# Altium PCB Main.PcbDoc (part 1 of 4)
Units mm, origin at the board's own origin, x right, y up, seen from the top; angles counter-clockwise.
Board outline 282.3 x 31.89 mm, 2 copper layers (Top Layer, Bottom Layer); 208 components, 197 nets, 886 pads, 366 vias.
Unrouted connection lines stored in the file: 118.
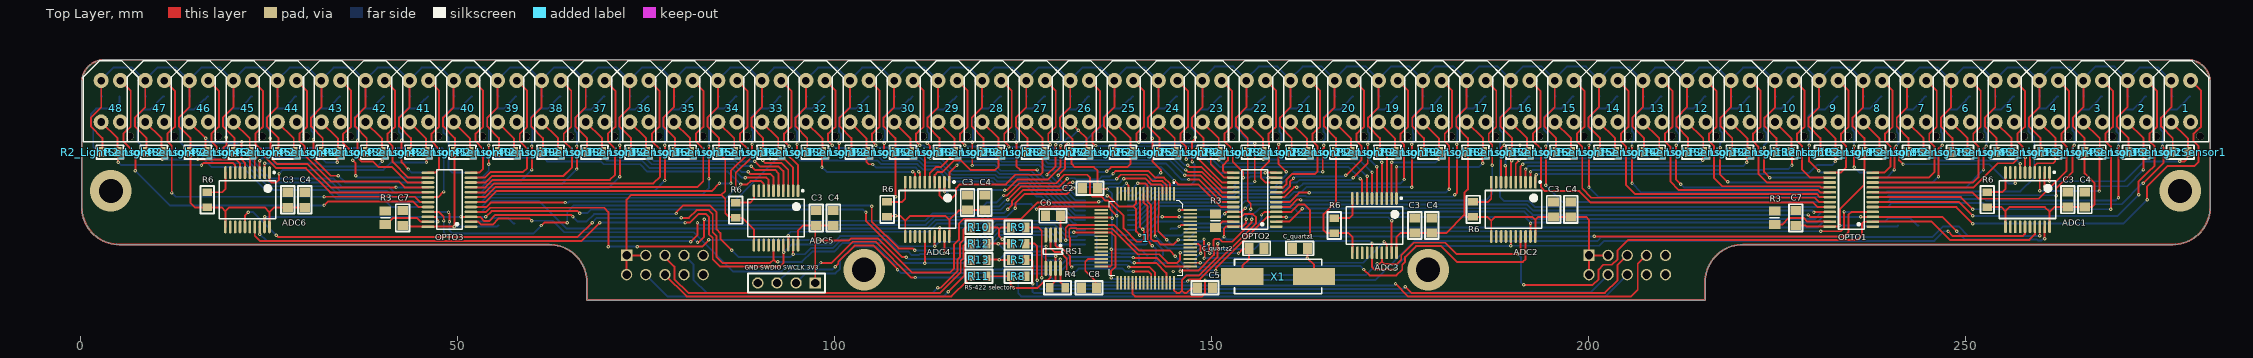
[diagram p0: Top Layer view]
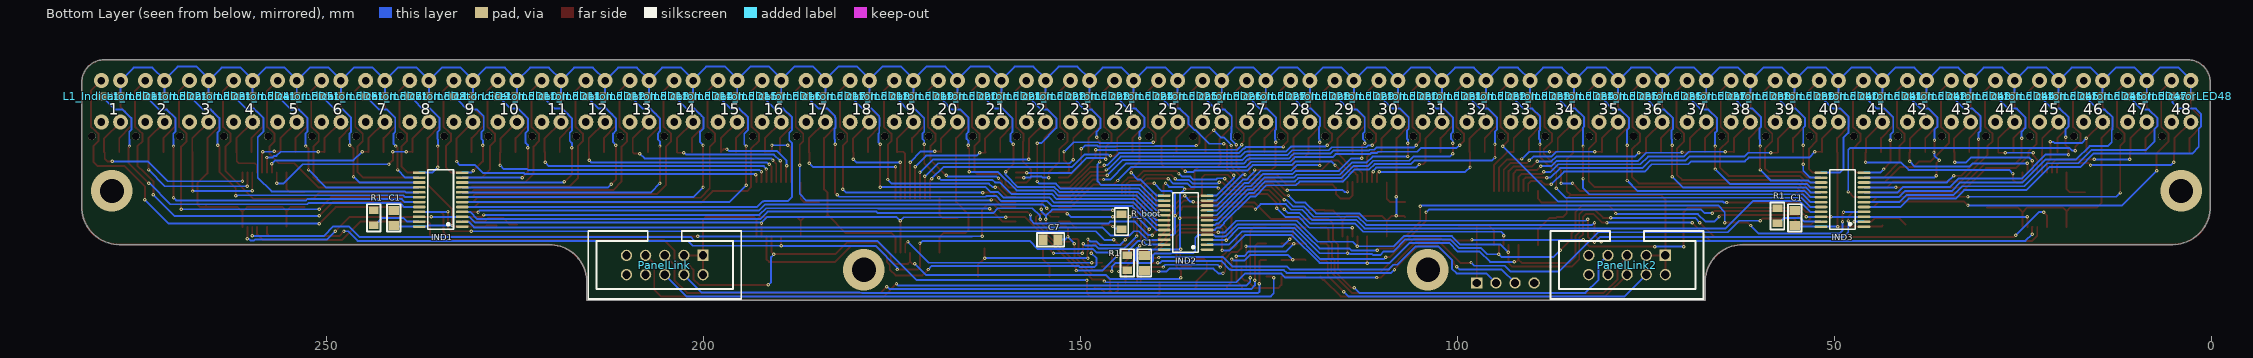
[diagram p1: Bottom Layer view, seen from below]
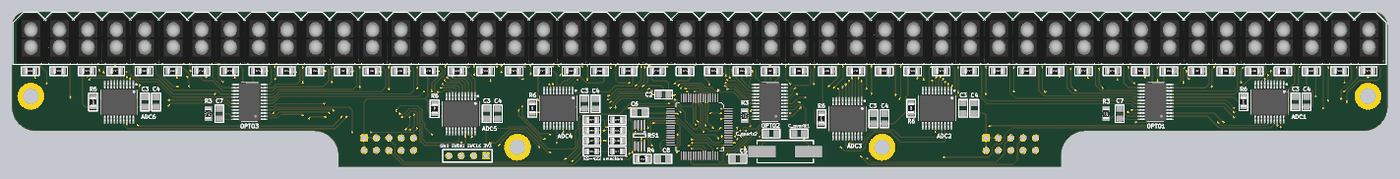
[diagram p5: 3D render of the assembled board from above, using the file's embedded part models]
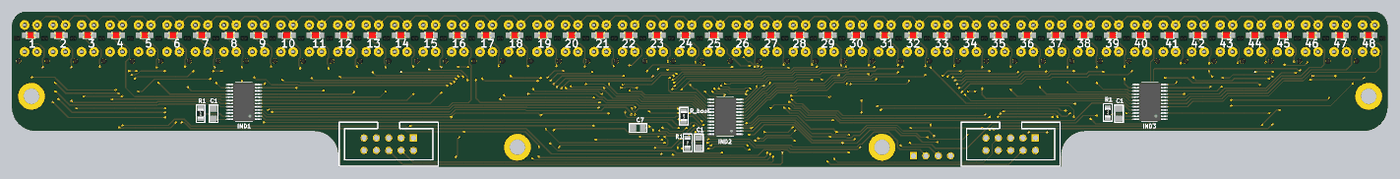
[diagram p6: 3D render of the assembled board from below, using the file's embedded part models]

## Layer stack, top to bottom
Top Solder: solder mask 0.0102, Solder Resist, Dk 3.5
Top Layer: signal copper 0.0356
Dielectric 1: dielectric 0.32, FR-4, Dk 4.8
Bottom Layer: signal copper 0.0356
Bottom Solder: solder mask 0.0102, Solder Resist, Dk 3.5

## Board outline
5.127,17.66 62.127,17.66 cw(c62.127,12.66) 67.127,12.66 67.127,10.287 215.427,10.287 215.427,12.66 cw(c220.427,12.66) 220.427,17.66 277.427,17.66 ccw(c277.427,22.66) 282.427,22.66 282.427,39.176 ccw(c279.427,39.176) 279.427,42.176 3.127,42.176 ccw(c3.127,39.176) 0.127,39.176 0.127,22.66 ccw(c5.127,22.66)

## Design rules (kind name [scope] priority, off if disabled: settings)
Clearance [All] p1: gap=0.2 ignorepadtopadclearanceinfootprint=TRUE
ComponentClearance [All] p1: gap=0 collisioncheckmode=3 verticalgap=0 showdistances=FALSE
MinimumSolderMaskSliver [All] p1: minsoldermaskwidth=0.01
PolygonConnect [All] p1: connectstyle=Relief reliefconductorwidth=0.254 reliefentries=4 polygonreliefangle="90 Angle" airgapwidth=0.254
RoomDefinition LightSensor48 [InComponentClass('LightSensor48')] p1 off: confinementstyle=ConfineIn formatcopy=TRUE lockcomponents=FALSE outline 1.083,42.258 1.083,27.145 6.925,27.145 6.925,42.258
RoomDefinition LightSensor47 [InComponentClass('LightSensor47')] p2 off: confinementstyle=ConfineIn formatcopy=TRUE lockcomponents=FALSE outline 6.925,42.258 6.925,27.145 12.767,27.145 12.767,42.258
RoomDefinition LightSensor46 [InComponentClass('LightSensor46')] p3 off: confinementstyle=ConfineIn formatcopy=TRUE lockcomponents=FALSE outline 12.767,42.258 12.767,27.145 18.609,27.145 18.609,42.258
RoomDefinition LightSensor45 [InComponentClass('LightSensor45')] p4 off: confinementstyle=ConfineIn formatcopy=TRUE lockcomponents=FALSE outline 18.609,42.258 18.609,27.145 24.451,27.145 24.451,42.258
RoomDefinition LightSensor44 [InComponentClass('LightSensor44')] p5 off: confinementstyle=ConfineIn formatcopy=TRUE lockcomponents=FALSE outline 24.451,42.258 24.451,27.145 30.293,27.145 30.293,42.258
RoomDefinition LightSensor43 [InComponentClass('LightSensor43')] p6 off: confinementstyle=ConfineIn formatcopy=TRUE lockcomponents=FALSE outline 30.293,42.258 30.293,27.145 36.135,27.145 36.135,42.258
RoomDefinition LightSensor42 [InComponentClass('LightSensor42')] p7 off: confinementstyle=ConfineIn formatcopy=TRUE lockcomponents=FALSE outline 36.135,42.258 36.135,27.145 41.977,27.145 41.977,42.258
RoomDefinition LightSensor41 [InComponentClass('LightSensor41')] p8 off: confinementstyle=ConfineIn formatcopy=TRUE lockcomponents=FALSE outline 41.977,42.258 41.977,27.145 47.819,27.145 47.819,42.258
RoomDefinition LightSensor40 [InComponentClass('LightSensor40')] p9 off: confinementstyle=ConfineIn formatcopy=TRUE lockcomponents=FALSE outline 47.819,42.258 47.819,27.145 53.661,27.145 53.661,42.258
RoomDefinition LightSensor39 [InComponentClass('LightSensor39')] p10 off: confinementstyle=ConfineIn formatcopy=TRUE lockcomponents=FALSE outline 53.661,42.258 53.661,27.145 59.503,27.145 59.503,42.258
RoomDefinition LightSensor38 [InComponentClass('LightSensor38')] p11 off: confinementstyle=ConfineIn formatcopy=TRUE lockcomponents=FALSE outline 59.503,42.258 59.503,27.145 65.345,27.145 65.345,42.258
RoomDefinition LightSensor37 [InComponentClass('LightSensor37')] p12 off: confinementstyle=ConfineIn formatcopy=TRUE lockcomponents=FALSE outline 65.345,42.258 65.345,27.145 71.187,27.145 71.187,42.258
RoomDefinition LightSensor36 [InComponentClass('LightSensor36')] p13 off: confinementstyle=ConfineIn formatcopy=TRUE lockcomponents=FALSE outline 71.187,42.258 71.187,27.145 77.029,27.145 77.029,42.258
RoomDefinition LightSensor35 [InComponentClass('LightSensor35')] p14 off: confinementstyle=ConfineIn formatcopy=TRUE lockcomponents=FALSE outline 77.029,42.258 77.029,27.145 82.871,27.145 82.871,42.258
RoomDefinition LightSensor34 [InComponentClass('LightSensor34')] p15 off: confinementstyle=ConfineIn formatcopy=TRUE lockcomponents=FALSE outline 82.871,42.258 82.871,27.145 88.713,27.145 88.713,42.258
RoomDefinition LightSensor33 [InComponentClass('LightSensor33')] p16 off: confinementstyle=ConfineIn formatcopy=TRUE lockcomponents=FALSE outline 88.713,42.258 88.713,27.145 94.555,27.145 94.555,42.258
RoomDefinition LightSensor32 [InComponentClass('LightSensor32')] p17 off: confinementstyle=ConfineIn formatcopy=TRUE lockcomponents=FALSE outline 94.555,42.258 94.555,27.145 100.397,27.145 100.397,42.258
RoomDefinition LightSensor31 [InComponentClass('LightSensor31')] p18 off: confinementstyle=ConfineIn formatcopy=TRUE lockcomponents=FALSE outline 100.397,42.258 100.397,27.145 106.239,27.145 106.239,42.258
RoomDefinition LightSensor30 [InComponentClass('LightSensor30')] p19 off: confinementstyle=ConfineIn formatcopy=TRUE lockcomponents=FALSE outline 106.239,42.258 106.239,27.145 112.081,27.145 112.081,42.258
RoomDefinition LightSensor29 [InComponentClass('LightSensor29')] p20 off: confinementstyle=ConfineIn formatcopy=TRUE lockcomponents=FALSE outline 112.081,42.258 112.081,27.145 117.923,27.145 117.923,42.258
RoomDefinition LightSensor28 [InComponentClass('LightSensor28')] p21 off: confinementstyle=ConfineIn formatcopy=TRUE lockcomponents=FALSE outline 117.923,42.258 117.923,27.145 123.765,27.145 123.765,42.258
RoomDefinition LightSensor27 [InComponentClass('LightSensor27')] p22 off: confinementstyle=ConfineIn formatcopy=TRUE lockcomponents=FALSE outline 123.765,42.258 123.765,27.145 129.607,27.145 129.607,42.258
RoomDefinition LightSensor26 [InComponentClass('LightSensor26')] p23 off: confinementstyle=ConfineIn formatcopy=TRUE lockcomponents=FALSE outline 129.607,42.258 129.607,27.145 135.449,27.145 135.449,42.258
RoomDefinition LightSensor25 [InComponentClass('LightSensor25')] p24 off: confinementstyle=ConfineIn formatcopy=TRUE lockcomponents=FALSE outline 135.449,42.258 135.449,27.145 141.291,27.145 141.291,42.258
RoomDefinition LightSensor24 [InComponentClass('LightSensor24')] p25 off: confinementstyle=ConfineIn formatcopy=TRUE lockcomponents=FALSE outline 141.291,42.258 141.291,27.145 147.133,27.145 147.133,42.258
RoomDefinition LightSensor23 [InComponentClass('LightSensor23')] p26 off: confinementstyle=ConfineIn formatcopy=TRUE lockcomponents=FALSE outline 147.133,42.258 147.133,27.145 152.975,27.145 152.975,42.258
RoomDefinition LightSensor22 [InComponentClass('LightSensor22')] p27 off: confinementstyle=ConfineIn formatcopy=TRUE lockcomponents=FALSE outline 152.975,42.258 152.975,27.145 158.817,27.145 158.817,42.258
RoomDefinition LightSensor21 [InComponentClass('LightSensor21')] p28 off: confinementstyle=ConfineIn formatcopy=TRUE lockcomponents=FALSE outline 158.817,42.258 158.817,27.145 164.659,27.145 164.659,42.258
RoomDefinition LightSensor20 [InComponentClass('LightSensor20')] p29 off: confinementstyle=ConfineIn formatcopy=TRUE lockcomponents=FALSE outline 164.659,42.258 164.659,27.145 170.501,27.145 170.501,42.258
RoomDefinition LightSensor19 [InComponentClass('LightSensor19')] p30 off: confinementstyle=ConfineIn formatcopy=TRUE lockcomponents=FALSE outline 170.501,42.258 170.501,27.145 176.343,27.145 176.343,42.258
RoomDefinition LightSensor18 [InComponentClass('LightSensor18')] p31 off: confinementstyle=ConfineIn formatcopy=TRUE lockcomponents=FALSE outline 176.343,42.258 176.343,27.145 182.185,27.145 182.185,42.258
RoomDefinition LightSensor17 [InComponentClass('LightSensor17')] p32 off: confinementstyle=ConfineIn formatcopy=TRUE lockcomponents=FALSE outline 182.185,42.258 182.185,27.145 188.027,27.145 188.027,42.258
RoomDefinition LightSensor16 [InComponentClass('LightSensor16')] p33 off: confinementstyle=ConfineIn formatcopy=TRUE lockcomponents=FALSE outline 188.027,42.258 188.027,27.145 193.869,27.145 193.869,42.258
RoomDefinition LightSensor15 [InComponentClass('LightSensor15')] p34 off: confinementstyle=ConfineIn formatcopy=TRUE lockcomponents=FALSE outline 193.869,42.258 193.869,27.145 199.711,27.145 199.711,42.258
RoomDefinition LightSensor14 [InComponentClass('LightSensor14')] p35 off: confinementstyle=ConfineIn formatcopy=TRUE lockcomponents=FALSE outline 199.711,42.258 199.711,27.145 205.553,27.145 205.553,42.258
RoomDefinition LightSensor13 [InComponentClass('LightSensor13')] p36 off: confinementstyle=ConfineIn formatcopy=TRUE lockcomponents=FALSE outline 205.553,42.258 205.553,27.145 211.395,27.145 211.395,42.258
RoomDefinition LightSensor12 [InComponentClass('LightSensor12')] p37 off: confinementstyle=ConfineIn formatcopy=TRUE lockcomponents=FALSE outline 211.395,42.258 211.395,27.145 217.237,27.145 217.237,42.258
RoomDefinition LightSensor11 [InComponentClass('LightSensor11')] p38 off: confinementstyle=ConfineIn formatcopy=TRUE lockcomponents=FALSE outline 217.237,42.258 217.237,27.145 223.079,27.145 223.079,42.258
RoomDefinition LightSensor10 [InComponentClass('LightSensor10')] p39 off: confinementstyle=ConfineIn formatcopy=TRUE lockcomponents=FALSE outline 223.079,42.258 223.079,27.145 228.921,27.145 228.921,42.258
RoomDefinition LightSensor9 [InComponentClass('LightSensor9')] p40 off: confinementstyle=ConfineIn formatcopy=TRUE lockcomponents=FALSE outline 228.921,42.258 228.921,27.145 234.763,27.145 234.763,42.258
RoomDefinition LightSensor8 [InComponentClass('LightSensor8')] p41 off: confinementstyle=ConfineIn formatcopy=TRUE lockcomponents=FALSE outline 234.763,42.258 234.763,27.145 240.605,27.145 240.605,42.258
RoomDefinition LightSensor7 [InComponentClass('LightSensor7')] p42 off: confinementstyle=ConfineIn formatcopy=TRUE lockcomponents=FALSE outline 240.605,42.258 240.605,27.145 246.447,27.145 246.447,42.258
RoomDefinition LightSensor6 [InComponentClass('LightSensor6')] p43 off: confinementstyle=ConfineIn formatcopy=TRUE lockcomponents=FALSE outline 246.447,42.258 246.447,27.145 252.289,27.145 252.289,42.258
RoomDefinition LightSensor5 [InComponentClass('LightSensor5')] p44 off: confinementstyle=ConfineIn formatcopy=TRUE lockcomponents=FALSE outline 252.289,42.258 252.289,27.145 258.131,27.145 258.131,42.258
RoomDefinition LightSensor4 [InComponentClass('LightSensor4')] p45 off: confinementstyle=ConfineIn formatcopy=TRUE lockcomponents=FALSE outline 258.131,42.258 258.131,27.145 263.973,27.145 263.973,42.258
RoomDefinition LightSensor3 [InComponentClass('LightSensor3')] p46 off: confinementstyle=ConfineIn formatcopy=TRUE lockcomponents=FALSE outline 263.973,42.258 263.973,27.145 269.815,27.145 269.815,42.258
RoomDefinition LightSensor2 [InComponentClass('LightSensor2')] p47 off: confinementstyle=ConfineIn formatcopy=TRUE lockcomponents=FALSE outline 269.815,42.258 269.815,27.145 275.657,27.145 275.657,42.258
RoomDefinition LightSensor1 [InComponentClass('LightSensor1')] p48 off: confinementstyle=ConfineIn formatcopy=TRUE lockcomponents=FALSE outline 275.657,42.258 275.657,27.145 281.499,27.145 281.499,42.258
RoomDefinition IndicatorLED48 [InComponentClass('IndicatorLED48')] p49 off: confinementstyle=ConfineIn formatcopy=TRUE lockcomponents=FALSE outline 1.083,38.321 1.083,36.162 6.925,36.162 6.925,38.321
RoomDefinition IndicatorLED47 [InComponentClass('IndicatorLED47')] p50 off: confinementstyle=ConfineIn formatcopy=TRUE lockcomponents=FALSE outline 6.925,38.321 6.925,36.162 12.767,36.162 12.767,38.321
RoomDefinition IndicatorLED46 [InComponentClass('IndicatorLED46')] p51 off: confinementstyle=ConfineIn formatcopy=TRUE lockcomponents=FALSE outline 12.767,38.321 12.767,36.162 18.609,36.162 18.609,38.321
RoomDefinition IndicatorLED45 [InComponentClass('IndicatorLED45')] p52 off: confinementstyle=ConfineIn formatcopy=TRUE lockcomponents=FALSE outline 18.609,38.321 18.609,36.162 24.451,36.162 24.451,38.321
RoomDefinition IndicatorLED44 [InComponentClass('IndicatorLED44')] p53 off: confinementstyle=ConfineIn formatcopy=TRUE lockcomponents=FALSE outline 24.451,38.321 24.451,36.162 30.293,36.162 30.293,38.321
RoomDefinition IndicatorLED43 [InComponentClass('IndicatorLED43')] p54 off: confinementstyle=ConfineIn formatcopy=TRUE lockcomponents=FALSE outline 30.293,38.321 30.293,36.162 36.135,36.162 36.135,38.321
RoomDefinition IndicatorLED42 [InComponentClass('IndicatorLED42')] p55 off: confinementstyle=ConfineIn formatcopy=TRUE lockcomponents=FALSE outline 36.135,38.321 36.135,36.162 41.977,36.162 41.977,38.321
RoomDefinition IndicatorLED41 [InComponentClass('IndicatorLED41')] p56 off: confinementstyle=ConfineIn formatcopy=TRUE lockcomponents=FALSE outline 41.977,38.321 41.977,36.162 47.819,36.162 47.819,38.321
RoomDefinition IndicatorLED40 [InComponentClass('IndicatorLED40')] p57 off: confinementstyle=ConfineIn formatcopy=TRUE lockcomponents=FALSE outline 47.819,38.321 47.819,36.162 53.661,36.162 53.661,38.321
RoomDefinition IndicatorLED39 [InComponentClass('IndicatorLED39')] p58 off: confinementstyle=ConfineIn formatcopy=TRUE lockcomponents=FALSE outline 53.661,38.321 53.661,36.162 59.503,36.162 59.503,38.321
RoomDefinition IndicatorLED38 [InComponentClass('IndicatorLED38')] p59 off: confinementstyle=ConfineIn formatcopy=TRUE lockcomponents=FALSE outline 59.503,38.321 59.503,36.162 65.345,36.162 65.345,38.321
RoomDefinition IndicatorLED37 [InComponentClass('IndicatorLED37')] p60 off: confinementstyle=ConfineIn formatcopy=TRUE lockcomponents=FALSE outline 65.345,38.321 65.345,36.162 71.187,36.162 71.187,38.321
RoomDefinition IndicatorLED36 [InComponentClass('IndicatorLED36')] p61 off: confinementstyle=ConfineIn formatcopy=TRUE lockcomponents=FALSE outline 71.187,38.321 71.187,36.162 77.029,36.162 77.029,38.321
RoomDefinition IndicatorLED35 [InComponentClass('IndicatorLED35')] p62 off: confinementstyle=ConfineIn formatcopy=TRUE lockcomponents=FALSE outline 77.029,38.321 77.029,36.162 82.871,36.162 82.871,38.321
RoomDefinition IndicatorLED34 [InComponentClass('IndicatorLED34')] p63 off: confinementstyle=ConfineIn formatcopy=TRUE lockcomponents=FALSE outline 82.871,38.321 82.871,36.162 88.713,36.162 88.713,38.321
RoomDefinition IndicatorLED33 [InComponentClass('IndicatorLED33')] p64 off: confinementstyle=ConfineIn formatcopy=TRUE lockcomponents=FALSE outline 88.713,38.321 88.713,36.162 94.555,36.162 94.555,38.321
RoomDefinition IndicatorLED32 [InComponentClass('IndicatorLED32')] p65 off: confinementstyle=ConfineIn formatcopy=TRUE lockcomponents=FALSE outline 94.555,38.321 94.555,36.162 100.397,36.162 100.397,38.321
RoomDefinition IndicatorLED31 [InComponentClass('IndicatorLED31')] p66 off: confinementstyle=ConfineIn formatcopy=TRUE lockcomponents=FALSE outline 100.397,38.321 100.397,36.162 106.239,36.162 106.239,38.321
RoomDefinition IndicatorLED30 [InComponentClass('IndicatorLED30')] p67 off: confinementstyle=ConfineIn formatcopy=TRUE lockcomponents=FALSE outline 106.239,38.321 106.239,36.162 112.081,36.162 112.081,38.321
RoomDefinition IndicatorLED29 [InComponentClass('IndicatorLED29')] p68 off: confinementstyle=ConfineIn formatcopy=TRUE lockcomponents=FALSE outline 112.081,38.321 112.081,36.162 117.923,36.162 117.923,38.321
RoomDefinition IndicatorLED28 [InComponentClass('IndicatorLED28')] p69 off: confinementstyle=ConfineIn formatcopy=TRUE lockcomponents=FALSE outline 117.923,38.321 117.923,36.162 123.765,36.162 123.765,38.321
RoomDefinition IndicatorLED27 [InComponentClass('IndicatorLED27')] p70 off: confinementstyle=ConfineIn formatcopy=TRUE lockcomponents=FALSE outline 123.765,38.321 123.765,36.162 129.607,36.162 129.607,38.321
RoomDefinition IndicatorLED26 [InComponentClass('IndicatorLED26')] p71 off: confinementstyle=ConfineIn formatcopy=TRUE lockcomponents=FALSE outline 129.607,38.321 129.607,36.162 135.449,36.162 135.449,38.321
RoomDefinition IndicatorLED25 [InComponentClass('IndicatorLED25')] p72 off: confinementstyle=ConfineIn formatcopy=TRUE lockcomponents=FALSE outline 135.449,38.321 135.449,36.162 141.291,36.162 141.291,38.321
RoomDefinition IndicatorLED24 [InComponentClass('IndicatorLED24')] p73 off: confinementstyle=ConfineIn formatcopy=TRUE lockcomponents=FALSE outline 141.291,38.321 141.291,36.162 147.133,36.162 147.133,38.321
RoomDefinition IndicatorLED23 [InComponentClass('IndicatorLED23')] p74 off: confinementstyle=ConfineIn formatcopy=TRUE lockcomponents=FALSE outline 147.133,38.321 147.133,36.162 152.975,36.162 152.975,38.321
RoomDefinition IndicatorLED22 [InComponentClass('IndicatorLED22')] p75 off: confinementstyle=ConfineIn formatcopy=TRUE lockcomponents=FALSE outline 152.975,38.321 152.975,36.162 158.817,36.162 158.817,38.321
RoomDefinition IndicatorLED21 [InComponentClass('IndicatorLED21')] p76 off: confinementstyle=ConfineIn formatcopy=TRUE lockcomponents=FALSE outline 158.817,38.321 158.817,36.162 164.659,36.162 164.659,38.321
RoomDefinition IndicatorLED20 [InComponentClass('IndicatorLED20')] p77 off: confinementstyle=ConfineIn formatcopy=TRUE lockcomponents=FALSE outline 164.659,38.321 164.659,36.162 170.501,36.162 170.501,38.321
RoomDefinition IndicatorLED19 [InComponentClass('IndicatorLED19')] p78 off: confinementstyle=ConfineIn formatcopy=TRUE lockcomponents=FALSE outline 170.501,38.321 170.501,36.162 176.343,36.162 176.343,38.321
RoomDefinition IndicatorLED18 [InComponentClass('IndicatorLED18')] p79 off: confinementstyle=ConfineIn formatcopy=TRUE lockcomponents=FALSE outline 176.343,38.321 176.343,36.162 182.185,36.162 182.185,38.321
RoomDefinition IndicatorLED17 [InComponentClass('IndicatorLED17')] p80 off: confinementstyle=ConfineIn formatcopy=TRUE lockcomponents=FALSE outline 182.185,38.321 182.185,36.162 188.027,36.162 188.027,38.321
RoomDefinition IndicatorLED16 [InComponentClass('IndicatorLED16')] p81 off: confinementstyle=ConfineIn formatcopy=TRUE lockcomponents=FALSE outline 188.027,38.321 188.027,36.162 193.869,36.162 193.869,38.321
RoomDefinition IndicatorLED15 [InComponentClass('IndicatorLED15')] p82 off: confinementstyle=ConfineIn formatcopy=TRUE lockcomponents=FALSE outline 193.869,38.321 193.869,36.162 199.711,36.162 199.711,38.321
RoomDefinition IndicatorLED14 [InComponentClass('IndicatorLED14')] p83 off: confinementstyle=ConfineIn formatcopy=TRUE lockcomponents=FALSE outline 199.711,38.321 199.711,36.162 205.553,36.162 205.553,38.321
RoomDefinition IndicatorLED13 [InComponentClass('IndicatorLED13')] p84 off: confinementstyle=ConfineIn formatcopy=TRUE lockcomponents=FALSE outline 205.553,38.321 205.553,36.162 211.395,36.162 211.395,38.321
RoomDefinition IndicatorLED12 [InComponentClass('IndicatorLED12')] p85 off: confinementstyle=ConfineIn formatcopy=TRUE lockcomponents=FALSE outline 211.395,38.321 211.395,36.162 217.237,36.162 217.237,38.321
RoomDefinition IndicatorLED11 [InComponentClass('IndicatorLED11')] p86 off: confinementstyle=ConfineIn formatcopy=TRUE lockcomponents=FALSE outline 217.237,38.321 217.237,36.162 223.079,36.162 223.079,38.321
RoomDefinition IndicatorLED10 [InComponentClass('IndicatorLED10')] p87 off: confinementstyle=ConfineIn formatcopy=TRUE lockcomponents=FALSE outline 223.079,38.321 223.079,36.162 228.921,36.162 228.921,38.321
RoomDefinition IndicatorLED9 [InComponentClass('IndicatorLED9')] p88 off: confinementstyle=ConfineIn formatcopy=TRUE lockcomponents=FALSE outline 228.921,38.321 228.921,36.162 234.763,36.162 234.763,38.321
RoomDefinition IndicatorLED8 [InComponentClass('IndicatorLED8')] p89 off: confinementstyle=ConfineIn formatcopy=TRUE lockcomponents=FALSE outline 234.763,38.321 234.763,36.162 240.605,36.162 240.605,38.321
RoomDefinition IndicatorLED7 [InComponentClass('IndicatorLED7')] p90 off: confinementstyle=ConfineIn formatcopy=TRUE lockcomponents=FALSE outline 240.605,38.321 240.605,36.162 246.447,36.162 246.447,38.321
RoomDefinition IndicatorLED6 [InComponentClass('IndicatorLED6')] p91 off: confinementstyle=ConfineIn formatcopy=TRUE lockcomponents=FALSE outline 246.447,38.321 246.447,36.162 252.289,36.162 252.289,38.321
RoomDefinition IndicatorLED5 [InComponentClass('IndicatorLED5')] p92 off: confinementstyle=ConfineIn formatcopy=TRUE lockcomponents=FALSE outline 252.289,38.321 252.289,36.162 258.131,36.162 258.131,38.321
RoomDefinition IndicatorLED4 [InComponentClass('IndicatorLED4')] p93 off: confinementstyle=ConfineIn formatcopy=TRUE lockcomponents=FALSE outline 258.131,38.321 258.131,36.162 263.973,36.162 263.973,38.321
RoomDefinition IndicatorLED3 [InComponentClass('IndicatorLED3')] p94 off: confinementstyle=ConfineIn formatcopy=TRUE lockcomponents=FALSE outline 263.973,38.321 263.973,36.162 269.815,36.162 269.815,38.321
RoomDefinition IndicatorLED2 [InComponentClass('IndicatorLED2')] p95 off: confinementstyle=ConfineIn formatcopy=TRUE lockcomponents=FALSE outline 269.815,38.321 269.815,36.162 275.657,36.162 275.657,38.321
RoomDefinition IndicatorLED1 [InComponentClass('IndicatorLED1')] p96 off: confinementstyle=ConfineIn formatcopy=TRUE lockcomponents=FALSE outline 275.657,38.321 275.657,36.162 281.499,36.162 281.499,38.321
RoutingVias [All] p1: holewidth=0.2 width=0.45 viastyle="Through Hole" minholewidth=0.2 minwidth=0.45 maxholewidth=100 maxwidth=100
SilkToSilkClearance [All] p1: silktosilkclearance=0
SolderMaskExpansion [All] p1: expansion=0.102 istentingtop=FALSE
Width [All] p1: maxlimit=0.254 minlimit=0.254 preferedwidth=0.254
27 further rules are at their usual default settings.

## Classes and differential pairs
channel class SensorControl: OPTO1 OPTO2 OPTO3
channel class LightSensors: LightSensor1 LightSensor2 LightSensor3 LightSensor4 LightSensor5 LightSensor6 LightSensor7 LightSensor8 LightSensor9 LightSensor10 LightSensor11 LightSensor12 LightSensor13 LightSensor14 LightSensor15 LightSensor16 LightSensor17 LightSensor18 LightSensor19 LightSensor20 LightSensor21 LightSensor22 LightSensor23 LightSensor24 LightSensor25 LightSensor26 LightSensor27 LightSensor28 LightSensor29 LightSensor30 LightSensor31 LightSensor32 LightSensor33 LightSensor34 LightSensor35 LightSensor36 LightSensor37 LightSensor38 LightSensor39 LightSensor40 LightSensor41 LightSensor42 LightSensor43 LightSensor44 LightSensor45 LightSensor46 LightSensor47 LightSensor48
channel class IndicatorLEDs: IndicatorLED1 IndicatorLED2 IndicatorLED3 IndicatorLED4 IndicatorLED5 IndicatorLED6 IndicatorLED7 IndicatorLED8 IndicatorLED9 IndicatorLED10 IndicatorLED11 IndicatorLED12 IndicatorLED13 IndicatorLED14 IndicatorLED15 IndicatorLED16 IndicatorLED17 IndicatorLED18 IndicatorLED19 IndicatorLED20 IndicatorLED21 IndicatorLED22 IndicatorLED23 IndicatorLED24 IndicatorLED25 IndicatorLED26 IndicatorLED27 IndicatorLED28 IndicatorLED29 IndicatorLED30 IndicatorLED31 IndicatorLED32 IndicatorLED33 IndicatorLED34 IndicatorLED35 IndicatorLED36 IndicatorLED37 IndicatorLED38 IndicatorLED39 IndicatorLED40 IndicatorLED41 IndicatorLED42 IndicatorLED43 IndicatorLED44 IndicatorLED45 IndicatorLED46 IndicatorLED47 IndicatorLED48
channel class IndicatorControl: IND1 IND2 IND3
channel class ADCs: ADC1 ADC2 ADC3 ADC4 ADC5 ADC6
net class SENS[1..48]: SENS1 SENS2 SENS3 SENS4 SENS5 SENS6 SENS7 SENS8 SENS9 SENS10 SENS11 SENS12 SENS13 SENS14 SENS15 SENS16 SENS17 SENS18 SENS19 SENS20 SENS21 SENS22 SENS23 SENS24 SENS25 SENS26 SENS27 SENS28 SENS29 SENS30 SENS31 SENS32 SENS33 SENS34 SENS35 SENS36 SENS37 SENS38 SENS39 SENS40 SENS41 SENS42 SENS43 SENS44 SENS45 SENS46 SENS47 SENS48
net class LED_SENS[1..48]: LED_SENS1 LED_SENS2 LED_SENS3 LED_SENS4 LED_SENS5 LED_SENS6 LED_SENS7 LED_SENS8 LED_SENS9 LED_SENS10 LED_SENS11 LED_SENS12 LED_SENS13 LED_SENS14 LED_SENS15 LED_SENS16 LED_SENS17 LED_SENS18 LED_SENS19 LED_SENS20 LED_SENS21 LED_SENS22 LED_SENS23 LED_SENS24 LED_SENS25 LED_SENS26 LED_SENS27 LED_SENS28 LED_SENS29 LED_SENS30 LED_SENS31 LED_SENS32 LED_SENS33 LED_SENS34 LED_SENS35 LED_SENS36 LED_SENS37 LED_SENS38 LED_SENS39 LED_SENS40 LED_SENS41 LED_SENS42 LED_SENS43 LED_SENS44 LED_SENS45 LED_SENS46 LED_SENS47 LED_SENS48
net class LED_IND[1..48]: LED_IND1 LED_IND2 LED_IND3 LED_IND4 LED_IND5 LED_IND6 LED_IND7 LED_IND8 LED_IND9 LED_IND10 LED_IND11 LED_IND12 LED_IND13 LED_IND14 LED_IND15 LED_IND16 LED_IND17 LED_IND18 LED_IND19 LED_IND20 LED_IND21 LED_IND22 LED_IND23 LED_IND24 LED_IND25 LED_IND26 LED_IND27 LED_IND28 LED_IND29 LED_IND30 LED_IND31 LED_IND32 LED_IND33 LED_IND34 LED_IND35 LED_IND36 LED_IND37 LED_IND38 LED_IND39 LED_IND40 LED_IND41 LED_IND42 LED_IND43 LED_IND44 LED_IND45 LED_IND46 LED_IND47 LED_IND48
component class OPTO3: C7 OPTO3
component class OPTO2: OPTO2 R3
component class OPTO1: 0.8 OPTO1
component class microcontroller: C2 C5 C6 C8 C_quartz1 C_quartz2 "GND SWDIO SWCLK 3V3" PanelLink PanelLink2 R4 R_boot RS1 X1
component class LightSensor48: 48 R2_LightSensor48
component class LightSensor47: 47 R2_LightSensor47
component class LightSensor46: 46 R2_LightSensor46
component class LightSensor45: 45 R2_LightSensor45
component class LightSensor44: 44 R2_LightSensor44
component class LightSensor43: 43 R2_LightSensor43
component class LightSensor42: 42 R2_LightSensor42
component class LightSensor41: 41 R2_LightSensor41
component class LightSensor40: 40 R2_LightSensor40
component class LightSensor39: 39 R2_LightSensor39
component class LightSensor38: 38 R2_LightSensor38
component class LightSensor37: 37 R2_LightSensor37
component class LightSensor36: 36 R2_LightSensor36
component class LightSensor35: 35 R2_LightSensor35
component class LightSensor34: 34 R2_LightSensor34
component class LightSensor33: 33 R2_LightSensor33
component class LightSensor32: 32 R2_LightSensor32
component class LightSensor31: 31 R2_LightSensor31
component class LightSensor30: 30 R2_LightSensor30
component class LightSensor29: 29 R2_LightSensor29
component class LightSensor28: 28 R2_LightSensor28
component class LightSensor27: 27 R2_LightSensor27
component class LightSensor26: 26 R2_LightSensor26
component class LightSensor25: 25 R2_LightSensor25
component class LightSensor24: 24 R2_LightSensor24
component class LightSensor23: 23 R2_LightSensor23
component class LightSensor22: 22 R2_LightSensor22
component class LightSensor21: 21 R2_LightSensor21
component class LightSensor20: 20 R2_LightSensor20
component class LightSensor19: 19 R2_LightSensor19
component class LightSensor18: 18 R2_LightSensor18
component class LightSensor17: 17 R2_LightSensor17
component class LightSensor16: 16 R2_LightSensor16
component class LightSensor15: 15 R2_LightSensor15
component class LightSensor14: 14 R2_LightSensor14
component class LightSensor13: 13 R2_LightSensor13
component class LightSensor12: 12 R2_LightSensor12
component class LightSensor11: 11 R2_LightSensor11
component class LightSensor10: 10 R2_LightSensor10
component class LightSensor9: 9 R2_LightSensor9
component class LightSensor8: 8 R2_LightSensor8
component class LightSensor7: 7 R2_LightSensor7
component class LightSensor6: 6 R2_LightSensor6
component class LightSensor5: 5 R2_LightSensor5
component class LightSensor4: 4 R2_LightSensor4
component class LightSensor3: 3 R2_LightSensor3
component class LightSensor2: 2 R2_LightSensor2
component class LightSensor1: R2_LightSensor1
component class IndicatorLED48: L1_IndicatorLED48
component class IndicatorLED47: L1_IndicatorLED47
component class IndicatorLED46: L1_IndicatorLED46
component class IndicatorLED45: L1_IndicatorLED45
component class IndicatorLED44: L1_IndicatorLED44
component class IndicatorLED43: L1_IndicatorLED43
component class IndicatorLED42: L1_IndicatorLED42
component class IndicatorLED41: L1_IndicatorLED41
component class IndicatorLED40: L1_IndicatorLED40
component class IndicatorLED39: L1_IndicatorLED39
component class IndicatorLED38: L1_IndicatorLED38
component class IndicatorLED37: L1_IndicatorLED37
component class IndicatorLED36: L1_IndicatorLED36
component class IndicatorLED35: L1_IndicatorLED35
component class IndicatorLED34: L1_IndicatorLED34
component class IndicatorLED33: L1_IndicatorLED33
component class IndicatorLED32: L1_IndicatorLED32
component class IndicatorLED31: L1_IndicatorLED31
component class IndicatorLED30: L1_IndicatorLED30
component class IndicatorLED29: L1_IndicatorLED29
component class IndicatorLED28: L1_IndicatorLED28
component class IndicatorLED27: L1_IndicatorLED27
component class IndicatorLED26: L1_IndicatorLED26
component class IndicatorLED25: L1_IndicatorLED25
component class IndicatorLED24: L1_IndicatorLED24
component class IndicatorLED23: L1_IndicatorLED23
component class IndicatorLED22: L1_IndicatorLED22
component class IndicatorLED21: L1_IndicatorLED21
component class IndicatorLED20: L1_IndicatorLED20
component class IndicatorLED19: L1_IndicatorLED19
component class IndicatorLED18: L1_IndicatorLED18
component class IndicatorLED17: L1_IndicatorLED17
component class IndicatorLED16: L1_IndicatorLED16
component class IndicatorLED15: L1_IndicatorLED15
component class IndicatorLED14: L1_IndicatorLED14
component class IndicatorLED13: L1_IndicatorLED13
component class IndicatorLED12: L1_IndicatorLED12
component class IndicatorLED11: L1_IndicatorLED11
component class IndicatorLED10: L1_IndicatorLED10
component class IndicatorLED9: L1_IndicatorLED9
component class IndicatorLED8: L1_IndicatorLED8
component class IndicatorLED7: L1_IndicatorLED7
component class IndicatorLED6: L1_IndicatorLED6
component class IndicatorLED5: L1_IndicatorLED5
component class IndicatorLED4: L1_IndicatorLED4
component class IndicatorLED3: L1_IndicatorLED3
component class IndicatorLED2: L1_IndicatorLED2
component class IndicatorLED1: L1_IndicatorLED1
component class IND3: C1 IND3 R1
component class IND2: C1 IND2 R1
component class IND1: C1 IND1 R1
component class ADC6: ADC6 R6
component class ADC5: ADC5
component class ADC4: ADC4
component class ADC3: ADC3
component class ADC2: ADC2 C4
component class ADC1: ADC1

## Components (designator, comment, footprint, x,y, rotation, side; value= is the part's Value field where it differs from the comment)
1 "64-pin STM32F4 chip with symbol for Foxcar Control Board v1." LQFP64 141.224,18.509 r180 top
1 "TCRT5000" TCRT5000_NO_HOLE 278.451,36.67 r90 top (schematic designator U2)
2 "TCRT5000" TCRT5000_NO_HOLE 272.609,36.67 r90 top (schematic designator U2)
3 "TCRT5000" TCRT5000_NO_HOLE 266.767,36.67 r90 top (schematic designator U2)
4 "TCRT5000" TCRT5000_NO_HOLE 260.925,36.67 r90 top (schematic designator U2)
5 "TCRT5000" TCRT5000_NO_HOLE 255.083,36.67 r90 top (schematic designator U2)
6 "TCRT5000" TCRT5000_NO_HOLE 249.241,36.67 r90 top (schematic designator U2)
7 "TCRT5000" TCRT5000_NO_HOLE 243.399,36.67 r90 top (schematic designator U2)
8 "TCRT5000" TCRT5000_NO_HOLE 237.557,36.67 r90 top (schematic designator U2)
9 "TCRT5000" TCRT5000_NO_HOLE 231.715,36.67 r90 top (schematic designator U2)
10 "TCRT5000" TCRT5000_NO_HOLE 225.873,36.67 r90 top (schematic designator U2)
11 "TCRT5000" TCRT5000_NO_HOLE 220.031,36.67 r90 top (schematic designator U2)
12 "TCRT5000" TCRT5000_NO_HOLE 214.189,36.67 r90 top (schematic designator U2)
13 "TCRT5000" TCRT5000_NO_HOLE 208.347,36.67 r90 top (schematic designator U2)
14 "TCRT5000" TCRT5000_NO_HOLE 202.505,36.67 r90 top (schematic designator U2)
15 "TCRT5000" TCRT5000_NO_HOLE 196.663,36.67 r90 top (schematic designator U2)
16 "TCRT5000" TCRT5000_NO_HOLE 190.821,36.67 r90 top (schematic designator U2)
17 "TCRT5000" TCRT5000_NO_HOLE 184.979,36.67 r90 top (schematic designator U2)
18 "TCRT5000" TCRT5000_NO_HOLE 179.137,36.67 r90 top (schematic designator U2)
19 "TCRT5000" TCRT5000_NO_HOLE 173.295,36.67 r90 top (schematic designator U2)
20 "TCRT5000" TCRT5000_NO_HOLE 167.453,36.67 r90 top (schematic designator U2)
21 "TCRT5000" TCRT5000_NO_HOLE 161.611,36.67 r90 top (schematic designator U2)
22 "TCRT5000" TCRT5000_NO_HOLE 155.769,36.67 r90 top (schematic designator U2)
23 "TCRT5000" TCRT5000_NO_HOLE 149.927,36.67 r90 top (schematic designator U2)
24 "TCRT5000" TCRT5000_NO_HOLE 144.085,36.67 r90 top (schematic designator U2)
25 "TCRT5000" TCRT5000_NO_HOLE 138.243,36.67 r90 top (schematic designator U2)
26 "TCRT5000" TCRT5000_NO_HOLE 132.401,36.67 r90 top (schematic designator U2)
27 "TCRT5000" TCRT5000_NO_HOLE 126.559,36.67 r90 top (schematic designator U2)
28 "TCRT5000" TCRT5000_NO_HOLE 120.717,36.67 r90 top (schematic designator U2)
29 "TCRT5000" TCRT5000_NO_HOLE 114.875,36.67 r90 top (schematic designator U2)
30 "TCRT5000" TCRT5000_NO_HOLE 109.033,36.67 r90 top (schematic designator U2)
31 "TCRT5000" TCRT5000_NO_HOLE 103.191,36.67 r90 top (schematic designator U2)
32 "TCRT5000" TCRT5000_NO_HOLE 97.349,36.67 r90 top (schematic designator U2)
33 "TCRT5000" TCRT5000_NO_HOLE 91.507,36.67 r90 top (schematic designator U2)
34 "TCRT5000" TCRT5000_NO_HOLE 85.665,36.67 r90 top (schematic designator U2)
35 "TCRT5000" TCRT5000_NO_HOLE 79.823,36.67 r90 top (schematic designator U2)
36 "TCRT5000" TCRT5000_NO_HOLE 73.981,36.67 r90 top (schematic designator U2)
37 "TCRT5000" TCRT5000_NO_HOLE 68.139,36.67 r90 top (schematic designator U2)
38 "TCRT5000" TCRT5000_NO_HOLE 62.297,36.67 r90 top (schematic designator U2)
39 "TCRT5000" TCRT5000_NO_HOLE 56.455,36.67 r90 top (schematic designator U2)
40 "TCRT5000" TCRT5000_NO_HOLE 50.613,36.67 r90 top (schematic designator U2)
41 "TCRT5000" TCRT5000_NO_HOLE 44.771,36.67 r90 top (schematic designator U2)
42 "TCRT5000" TCRT5000_NO_HOLE 38.929,36.67 r90 top (schematic designator U2)
43 "TCRT5000" TCRT5000_NO_HOLE 33.087,36.67 r90 top (schematic designator U2)
44 "TCRT5000" TCRT5000_NO_HOLE 27.245,36.67 r90 top (schematic designator U2)
45 "TCRT5000" TCRT5000_NO_HOLE 21.403,36.67 r90 top (schematic designator U2)
46 "TCRT5000" TCRT5000_NO_HOLE 15.561,36.67 r90 top (schematic designator U2)
47 "TCRT5000" TCRT5000_NO_HOLE 9.719,36.67 r90 top (schematic designator U2)
48 "TCRT5000" TCRT5000_NO_HOLE 3.877,36.67 r90 top (schematic designator U2)
ADC1 "MAX1110CAP+" "20-Pin SSOP" 258.191,23.622 r270 top (schematic designator U5)
ADC2 "MAX1110CAP+" "20-Pin SSOP" 189.992,22.336 r270 top (schematic designator U5)
ADC3 "MAX1110CAP+" "20-Pin SSOP" 171.577,20.177 r270 top (schematic designator U5)
ADC4 "MAX1110CAP+" "20-Pin SSOP" 112.268,22.336 r270 top (schematic designator U5)
ADC5 "MAX1110CAP+" "20-Pin SSOP" 92.202,21.193 r270 top (schematic designator U5)
ADC6 "MAX1110CAP+" "20-Pin SSOP" 22.098,23.606 r270 top (schematic designator U5)
C1 "100nF" FP_0805_CAP_085 55.245,21.209 r270 bottom
C1 "100nF" FP_0805_CAP_085 141.478,15.24 r90 bottom
C1 "100nF" FP_0805_CAP_085 241.046,21.209 r270 bottom
C2 "100nF" FP_0805_CAP_085 133.858,25.146 r0 top
C3 "100nF" FP_0805_CAP_085 195.326,22.336 r270 top
C3 "100nF" FP_0805_CAP_085 27.432,23.606 r270 top
C3 "100nF" FP_0805_CAP_085 97.536,21.193 r270 top
C3 "100nF" FP_0805_CAP_085 117.602,23.241 r270 top
C3 "100nF" FP_0805_CAP_085 176.911,20.177 r270 top
C3 "100nF" FP_0805_CAP_085 263.525,23.622 r270 top
C4 "1uF" FP_0805_CAP_085 29.718,23.606 r270 top
C4 "1uF" FP_0805_CAP_085 99.822,21.193 r270 top
C4 "1uF" FP_0805_CAP_085 119.888,23.241 r270 top
C4 "1uF" FP_0805_CAP_085 179.197,20.177 r270 top
C4 "1uF" FP_0805_CAP_085 197.612,22.336 r270 top
C4 "1uF" FP_0805_CAP_085 265.811,23.622 r270 top
C5 "100nF" FP_0805_CAP_085 149.098,11.938 r180 top
C6 "100nF" FP_0805_CAP_085 128.921,21.463 r180 top
C7 "100nF" FP_0805_CAP_085 42.672,21.209 r270 top
C7 "100nF" FP_0805_CAP_085 153.924,18.288 r180 bottom
C7 "100nF" FP_0805_CAP_085 227.457,21.209 r270 top
C8 "100nF" FP_0805_CAP_085 133.731,11.938 r0 top
C_quartz1 "22pF" FP_0805_CAP_085 161.671,17.145 r0 top
C_quartz2 "22pF" FP_0805_CAP_085 155.956,17.145 r180 top
"GND SWDIO SWCLK 3V3" "Connector" FP_CONN4_TUSKE_254MM 97.409,12.573 r90 top (schematic designator SWD)
IND1 "STP16CP05TTR" "24-Pin TSSOP" 234.823,23.622 r0 bottom (schematic designator U1)
IND2 "STP16CP05TTR" "24-Pin TSSOP" 136.017,20.574 r0 bottom (schematic designator U1)
IND3 "STP16CP05TTR" "24-Pin TSSOP" 48.895,23.622 r0 bottom (schematic designator U1)
L1_IndicatorLED1 "KPT-2012SURCK" 0808-LED 278.578,37.305 r0 bottom (schematic designator L1)
L1_IndicatorLED2 "KPT-2012SURCK" 0808-LED 272.736,37.305 r0 bottom (schematic designator L1)
L1_IndicatorLED3 "KPT-2012SURCK" 0808-LED 266.894,37.305 r0 bottom (schematic designator L1)
L1_IndicatorLED4 "KPT-2012SURCK" 0808-LED 261.052,37.305 r0 bottom (schematic designator L1)
L1_IndicatorLED5 "KPT-2012SURCK" 0808-LED 255.21,37.305 r0 bottom (schematic designator L1)
L1_IndicatorLED6 "KPT-2012SURCK" 0808-LED 249.368,37.305 r0 bottom (schematic designator L1)
L1_IndicatorLED7 "KPT-2012SURCK" 0808-LED 243.526,37.305 r0 bottom (schematic designator L1)
L1_IndicatorLED8 "KPT-2012SURCK" 0808-LED 237.684,37.305 r0 bottom (schematic designator L1)
L1_IndicatorLED9 "KPT-2012SURCK" 0808-LED 231.842,37.305 r0 bottom (schematic designator L1)
L1_IndicatorLED10 "KPT-2012SURCK" 0808-LED 226,37.305 r0 bottom (schematic designator L1)
L1_IndicatorLED11 "KPT-2012SURCK" 0808-LED 220.158,37.305 r0 bottom (schematic designator L1)
L1_IndicatorLED12 "KPT-2012SURCK" 0808-LED 214.316,37.305 r0 bottom (schematic designator L1)
L1_IndicatorLED13 "KPT-2012SURCK" 0808-LED 208.474,37.305 r0 bottom (schematic designator L1)
L1_IndicatorLED14 "KPT-2012SURCK" 0808-LED 202.632,37.305 r0 bottom (schematic designator L1)
L1_IndicatorLED15 "KPT-2012SURCK" 0808-LED 196.79,37.305 r0 bottom (schematic designator L1)
L1_IndicatorLED16 "KPT-2012SURCK" 0808-LED 190.948,37.305 r0 bottom (schematic designator L1)
L1_IndicatorLED17 "KPT-2012SURCK" 0808-LED 185.106,37.305 r0 bottom (schematic designator L1)
L1_IndicatorLED18 "KPT-2012SURCK" 0808-LED 179.264,37.305 r0 bottom (schematic designator L1)
L1_IndicatorLED19 "KPT-2012SURCK" 0808-LED 173.422,37.305 r0 bottom (schematic designator L1)
L1_IndicatorLED20 "KPT-2012SURCK" 0808-LED 167.58,37.305 r0 bottom (schematic designator L1)
L1_IndicatorLED21 "KPT-2012SURCK" 0808-LED 161.738,37.305 r0 bottom (schematic designator L1)
L1_IndicatorLED22 "KPT-2012SURCK" 0808-LED 155.896,37.305 r0 bottom (schematic designator L1)
L1_IndicatorLED23 "KPT-2012SURCK" 0808-LED 150.054,37.305 r0 bottom (schematic designator L1)
L1_IndicatorLED24 "KPT-2012SURCK" 0808-LED 144.212,37.305 r0 bottom (schematic designator L1)
L1_IndicatorLED25 "KPT-2012SURCK" 0808-LED 138.37,37.305 r0 bottom (schematic designator L1)
L1_IndicatorLED26 "KPT-2012SURCK" 0808-LED 132.528,37.305 r0 bottom (schematic designator L1)
L1_IndicatorLED27 "KPT-2012SURCK" 0808-LED 126.686,37.305 r0 bottom (schematic designator L1)
L1_IndicatorLED28 "KPT-2012SURCK" 0808-LED 120.844,37.305 r0 bottom (schematic designator L1)
L1_IndicatorLED29 "KPT-2012SURCK" 0808-LED 115.002,37.305 r0 bottom (schematic designator L1)
L1_IndicatorLED30 "KPT-2012SURCK" 0808-LED 109.16,37.305 r0 bottom (schematic designator L1)
L1_IndicatorLED31 "KPT-2012SURCK" 0808-LED 103.318,37.305 r0 bottom (schematic designator L1)
L1_IndicatorLED32 "KPT-2012SURCK" 0808-LED 97.476,37.305 r0 bottom (schematic designator L1)
L1_IndicatorLED33 "KPT-2012SURCK" 0808-LED 91.634,37.305 r0 bottom (schematic designator L1)
L1_IndicatorLED34 "KPT-2012SURCK" 0808-LED 85.792,37.305 r0 bottom (schematic designator L1)
L1_IndicatorLED35 "KPT-2012SURCK" 0808-LED 79.95,37.305 r0 bottom (schematic designator L1)
L1_IndicatorLED36 "KPT-2012SURCK" 0808-LED 74.108,37.305 r0 bottom (schematic designator L1)
L1_IndicatorLED37 "KPT-2012SURCK" 0808-LED 68.266,37.305 r0 bottom (schematic designator L1)
L1_IndicatorLED38 "KPT-2012SURCK" 0808-LED 62.424,37.305 r0 bottom (schematic designator L1)
L1_IndicatorLED39 "KPT-2012SURCK" 0808-LED 56.582,37.305 r0 bottom (schematic designator L1)
L1_IndicatorLED40 "KPT-2012SURCK" 0808-LED 50.74,37.305 r0 bottom (schematic designator L1)
L1_IndicatorLED41 "KPT-2012SURCK" 0808-LED 44.898,37.305 r0 bottom (schematic designator L1)
L1_IndicatorLED42 "KPT-2012SURCK" 0808-LED 39.056,37.305 r0 bottom (schematic designator L1)
L1_IndicatorLED43 "KPT-2012SURCK" 0808-LED 33.214,37.305 r0 bottom (schematic designator L1)
L1_IndicatorLED44 "KPT-2012SURCK" 0808-LED 27.372,37.305 r0 bottom (schematic designator L1)
L1_IndicatorLED45 "KPT-2012SURCK" 0808-LED 21.53,37.305 r0 bottom (schematic designator L1)
L1_IndicatorLED46 "KPT-2012SURCK" 0808-LED 15.688,37.305 r0 bottom (schematic designator L1)
L1_IndicatorLED47 "KPT-2012SURCK" 0808-LED 9.846,37.305 r0 bottom (schematic designator L1)
L1_IndicatorLED48 "KPT-2012SURCK" 0808-LED 4.004,37.305 r0 bottom (schematic designator L1)
OPTO1 "STP16CP05TTR" "24-Pin TSSOP" 234.823,23.622 r180 top (schematic designator U3)
OPTO2 "STP16CP05TTR" "24-Pin TSSOP" 155.702,23.622 r180 top (schematic designator U3)
OPTO3 "STP16CP05TTR" "24-Pin TSSOP" 48.895,23.622 r180 top (schematic designator U3)
PanelLink "Connector_10pin" FP_CONN10_SZK_ALLO 205.105,14.953 r0 bottom
PanelLink2 "Connector_10pin" FP_CONN10_SZK_ALLO 77.47,14.953 r0 bottom
R1 "8K2" FP_0805_RES 57.531,21.463 r90 bottom
R1 "8K2" FP_0805_RES 143.764,15.24 r270 bottom
R1 "8K2" FP_0805_RES 243.713,21.209 r90 bottom
R2_LightSensor1 "10K" FP_0805_RES 278.451,29.939 r180 top (schematic designator R2)
R2_LightSensor2 "10K" FP_0805_RES 272.609,29.939 r180 top (schematic designator R2)
R2_LightSensor3 "10K" FP_0805_RES 266.767,29.939 r180 top (schematic designator R2)
R2_LightSensor4 "10K" FP_0805_RES 260.925,29.939 r180 top (schematic designator R2)
R2_LightSensor5 "10K" FP_0805_RES 255.083,29.939 r180 top (schematic designator R2)
R2_LightSensor6 "10K" FP_0805_RES 249.241,29.939 r180 top (schematic designator R2)
R2_LightSensor7 "10K" FP_0805_RES 243.399,29.939 r180 top (schematic designator R2)
R2_LightSensor8 "10K" FP_0805_RES 237.557,29.939 r180 top (schematic designator R2)
R2_LightSensor9 "10K" FP_0805_RES 231.715,29.939 r180 top (schematic designator R2)
R2_LightSensor10 "10K" FP_0805_RES 225.873,29.939 r180 top (schematic designator R2)
R2_LightSensor11 "10K" FP_0805_RES 220.031,29.939 r180 top (schematic designator R2)
R2_LightSensor12 "10K" FP_0805_RES 214.189,29.939 r180 top (schematic designator R2)
R2_LightSensor13 "10K" FP_0805_RES 208.347,29.939 r180 top (schematic designator R2)
R2_LightSensor14 "10K" FP_0805_RES 202.505,29.939 r180 top (schematic designator R2)
R2_LightSensor15 "10K" FP_0805_RES 196.663,29.939 r180 top (schematic designator R2)
R2_LightSensor16 "10K" FP_0805_RES 190.821,29.939 r180 top (schematic designator R2)
R2_LightSensor17 "10K" FP_0805_RES 184.979,29.939 r180 top (schematic designator R2)
R2_LightSensor18 "10K" FP_0805_RES 179.137,29.939 r180 top (schematic designator R2)
R2_LightSensor19 "10K" FP_0805_RES 173.295,29.939 r180 top (schematic designator R2)
R2_LightSensor20 "10K" FP_0805_RES 167.453,29.939 r180 top (schematic designator R2)
R2_LightSensor21 "10K" FP_0805_RES 161.611,29.939 r180 top (schematic designator R2)
R2_LightSensor22 "10K" FP_0805_RES 155.769,29.939 r180 top (schematic designator R2)
R2_LightSensor23 "10K" FP_0805_RES 149.927,29.939 r180 top (schematic designator R2)
R2_LightSensor24 "10K" FP_0805_RES 144.085,29.939 r180 top (schematic designator R2)
R2_LightSensor25 "10K" FP_0805_RES 138.243,29.939 r180 top (schematic designator R2)
R2_LightSensor26 "10K" FP_0805_RES 132.401,29.939 r180 top (schematic designator R2)
R2_LightSensor27 "10K" FP_0805_RES 126.559,29.939 r180 top (schematic designator R2)
R2_LightSensor28 "10K" FP_0805_RES 120.717,29.939 r180 top (schematic designator R2)
R2_LightSensor29 "10K" FP_0805_RES 114.875,29.939 r180 top (schematic designator R2)
R2_LightSensor30 "10K" FP_0805_RES 109.033,29.939 r180 top (schematic designator R2)
R2_LightSensor31 "10K" FP_0805_RES 103.191,29.939 r180 top (schematic designator R2)
R2_LightSensor32 "10K" FP_0805_RES 97.349,29.939 r180 top (schematic designator R2)
R2_LightSensor33 "10K" FP_0805_RES 91.507,29.939 r180 top (schematic designator R2)
R2_LightSensor34 "10K" FP_0805_RES 85.665,29.939 r180 top (schematic designator R2)
R2_LightSensor35 "10K" FP_0805_RES 79.823,29.939 r180 top (schematic designator R2)
R2_LightSensor36 "10K" FP_0805_RES 73.981,29.939 r180 top (schematic designator R2)
R2_LightSensor37 "10K" FP_0805_RES 68.139,29.939 r180 top (schematic designator R2)
R2_LightSensor38 "10K" FP_0805_RES 62.297,29.939 r180 top (schematic designator R2)
R2_LightSensor39 "10K" FP_0805_RES 56.455,29.939 r180 top (schematic designator R2)
R2_LightSensor40 "10K" FP_0805_RES 50.613,29.939 r180 top (schematic designator R2)
R2_LightSensor41 "10K" FP_0805_RES 44.771,29.939 r180 top (schematic designator R2)
R2_LightSensor42 "10K" FP_0805_RES 38.929,29.939 r180 top (schematic designator R2)
R2_LightSensor43 "10K" FP_0805_RES 33.087,29.939 r180 top (schematic designator R2)
R2_LightSensor44 "10K" FP_0805_RES 27.245,29.939 r180 top (schematic designator R2)
R2_LightSensor45 "10K" FP_0805_RES 21.403,29.939 r180 top (schematic designator R2)
R2_LightSensor46 "10K" FP_0805_RES 15.561,29.939 r180 top (schematic designator R2)
R2_LightSensor47 "10K" FP_0805_RES 9.719,29.939 r180 top (schematic designator R2)
R2_LightSensor48 "10K" FP_0805_RES 3.877,29.939 r180 top (schematic designator R2)
R3 "CRCW0805806RFKEA" 0805-W 40.386,21.209 r90 top
R3 "CRCW0805806RFKEA" 0805-W 150.495,20.828 r90 top
R3 "CRCW0805806RFKEA" 0805-W 224.663,21.209 r90 top
R4 "120R" FP_0805_RES 129.54,11.938 r180 top
R5 "0R" FP_0805_RES 124.333,15.621 r0 top value=?
R6 "1K" FP_0805_RES 16.764,23.606 r270 top
R6 "1K" FP_0805_RES 86.868,22.225 r270 top
R6 "1K" FP_0805_RES 106.934,22.336 r270 top
R6 "1K" FP_0805_RES 166.243,20.177 r270 top
R6 "1K" FP_0805_RES 184.658,22.336 r270 top
R6 "1K" FP_0805_RES 252.857,23.622 r270 top
R7 "0R" FP_0805_RES 124.333,17.78 r0 top value=?
R8 "0R" FP_0805_RES 124.333,13.462 r0 top value=?
R9 "0R" FP_0805_RES 124.333,19.939 r0 top value=?
R10 "0R" FP_0805_RES 119.126,19.939 r0 top value=?
R11 "0R" FP_0805_RES 119.126,13.462 r0 top value=?
R12 "0R" FP_0805_RES 119.126,17.78 r0 top value=?
R13 "0R" FP_0805_RES 119.126,15.621 r0 top value=?
R_boot "10K" FP_0805_RES 144.526,20.701 r270 bottom (schematic designator R_boot1)
RS1 "RS-422" NSOIC-8 129.936,18.923 r270 top (schematic designator RS*)
X1 "20MHz" FP_CRYSTAL_HC49_SMD 163.576,13.429 r180 top value=8MHz

## Footprints (in the part's own frame and the unit in brackets; to place one, negate y for a bottom-side part, rotate by r counter-clockwise, add the part's x,y. Pads: shape width x height; smd on the part's side, far side on the other; paste and mask are expansions set on the pad)
"20-Pin SSOP" [mm]
  oval 1.7x0.35 smd mask+0.035: 1(-3.6,2.925) 2(-3.6,2.275) 3(-3.6,1.625) 4(-3.6,0.975) 5(-3.6,0.325) 6(-3.6,-0.325) 7(-3.6,-0.975) 8(-3.6,-1.625) 9(-3.6,-2.275) 10(-3.6,-2.925) 11(3.6,-2.925) 12(3.6,-2.275) 13(3.6,-1.625) 14(3.6,-0.975) 15(3.6,-0.325) 16(3.6,0.325) 17(3.6,0.975) 18(3.6,1.625) 19(3.6,2.275) 20(3.6,2.925)
  silkscreen extent -3.75,-3.75 2.5,3.75, body extent -3.93,-3.75 3.93,3.75, height 2.15
"24-Pin TSSOP" [mm]
  oval 1.7x0.35 smd mask+0.035: 1(-2.85,3.575) 2(-2.85,2.925) 3(-2.85,2.275) 4(-2.85,1.625) 5(-2.85,0.975) 6(-2.85,0.325) 7(-2.85,-0.325) 8(-2.85,-0.975) 9(-2.85,-1.625) 10(-2.85,-2.275) 11(-2.85,-2.925) 12(-2.85,-3.575) 13(2.85,-3.575) 14(2.85,-2.925) 15(2.85,-2.275) 16(2.85,-1.625) 17(2.85,-0.975) 18(2.85,-0.325) 19(2.85,0.325) 20(2.85,0.975) 21(2.85,1.625) 22(2.85,2.275) 23(2.85,2.925) 24(2.85,3.575)
  silkscreen extent -1.7,-3.95 1.7,3.95, body extent -3.27,-3.95 3.28,3.95, height 1.2
0805-W [mm]
  rect 1.2x1.5 smd mask+0.035: 1(-0.9,0) 2(0.9,0)
  silkscreen extent 0,-0.63 0,0.63, body extent -1,-0.62 1,0.63, height 0.45
0808-LED [mm]
  rect 1.25x1.1 smd mask+0.035: A(-1.175,0) K(1.175,0)
  silkscreen extent -0.1,-0.4 0.3,0.4, body extent -1.05,-0.67 1.05,0.68, height 0.9
FP_0805_CAP_085 [mm] "0805 kapacitás YAGEO 0.85mm magas"
  rect 1.2x1.4 smd: 1(-1,0) 2(1,0)
  silkscreen extent -1.8,-0.9 1.8,0.9, body extent -1,-0.64 1.03,0.64, height 0.85
FP_0805_RES [mm] "0805 ellenállás"
  rect 1x1.3 smd: 1(-1,0) 2(1,0)
  silkscreen extent -1.8,-0.9 1.8,0.9, body extent -1,-0.62 1,0.63, height 0.62
FP_CONN4_TUSKE_254MM [mm] "4×1 tüskesor"
  rect 1.5x1.5 hole 1.1: 1(0,0)
  round 1.5 hole 1.1: 2(0,2.54) 3(0,5.08) 4(0,7.62)
  silkscreen extent -1.27,-1.27 1.27,8.9, body extent -1.27,-1.27 1.27,8.89, height 8.54
FP_CONN10_SZK_ALLO [mm]
  rect 1.5x1.5 hole 1.1: 1(-5.08,-1.28)
  round 1.5 hole 1.1: 2(-5.08,1.28) 3(-2.54,-1.28) 4(-2.54,1.28) 5(0,-1.28) 6(0,1.28) 7(2.54,-1.28) 8(2.54,1.28) 9(5.08,-1.28) 10(5.08,1.28)
  silkscreen extent -10.15,-4.5 10.15,4.5, body extent -5.33,-1.33 5.49,1.87, height 9
FP_CRYSTAL_HC49_SMD [mil] "HC49/SMD"
  rect 220x90 smd: 1(0,0) 2(375,0)
  silkscreen extent -40,-90 415,90, body extent -57,-90 432,90, height 130